# Altium PCB Ultrasonic.PcbDoc
Units mm, origin at the board's own origin, x right, y up, seen from the top; angles counter-clockwise.
Board outline 24.94 x 23.94 mm, 2 copper layers (Top Layer, Bottom Layer); 4 components, 4 nets, 10 pads, 24 vias.
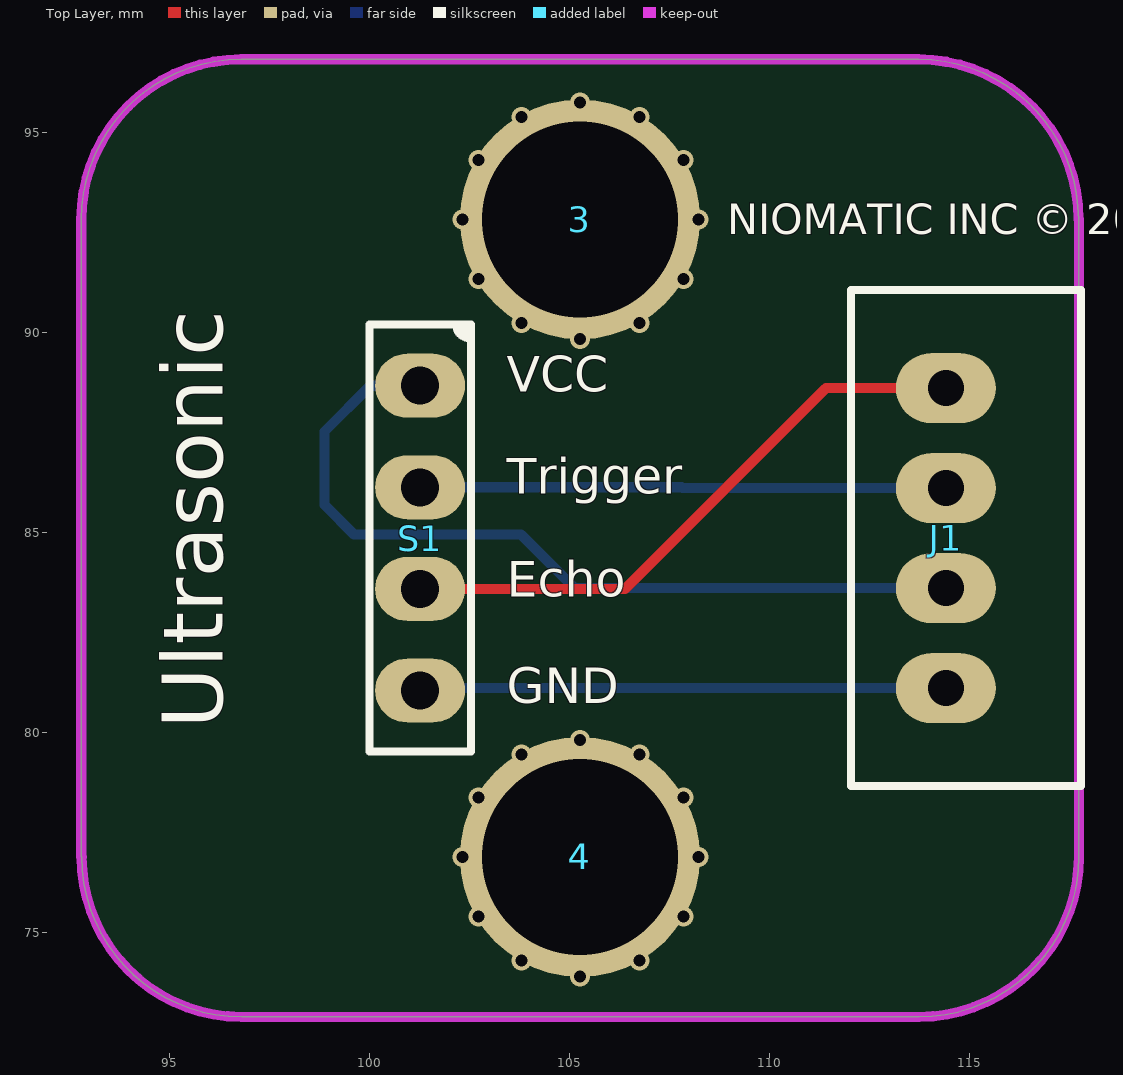
[diagram p0: Top Layer view]
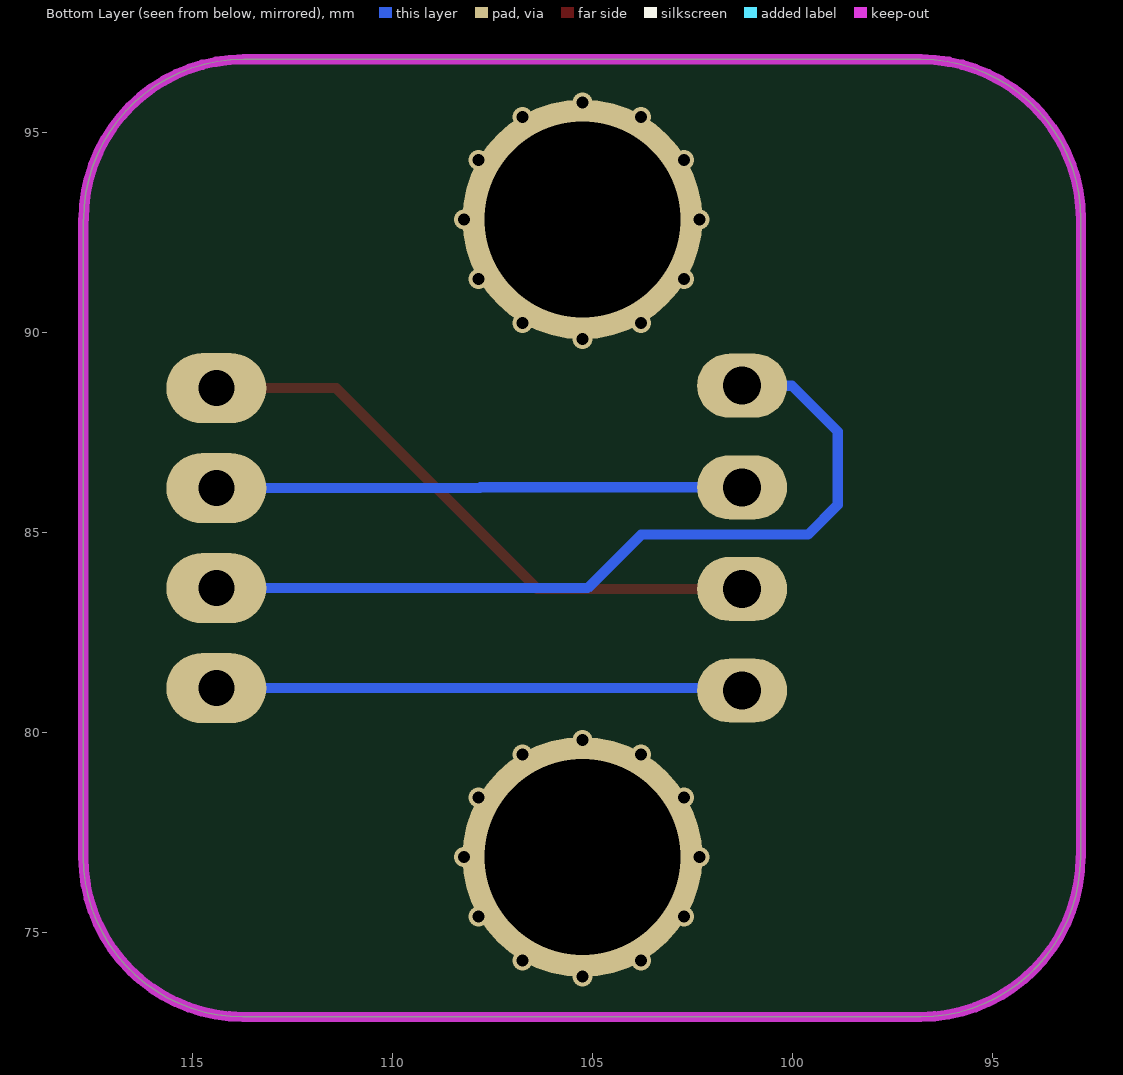
[diagram p1: Bottom Layer view, seen from below]

## Layer stack, top to bottom
Top Solder: solder mask 0.0102, Solder Resist, Dk 3.5
Top Layer: signal copper 0.0356
Dielectric 1: dielectric 0.32, FR-4, Dk 4.8
Bottom Layer: signal copper 0.0356
Bottom Solder: solder mask 0.0102, Solder Resist, Dk 3.5

## Board outline
92.79,76.88 92.79,92.82 cw(c96.79,92.82) 96.79,96.82 113.72,96.82 cw(c113.72,92.82) 117.72,92.82 117.729,92.82 117.729,76.88 cw(c113.729,76.88) 113.729,72.88 96.799,72.88 cw(c96.799,76.88)

## Design rules (kind name [scope] priority, off if disabled: settings)
Clearance [All] p1: gap=0.254 ignorepadtopadclearanceinfootprint=FALSE except(0: Arc-Hole Track-Hole SMDPad-Hole THPad-Hole Via-Hole Fill-Hole Poly-Hole Region-Hole Text-Hole)
PolygonConnect [All] p1: connectstyle=Relief reliefconductorwidth=0.254 reliefentries=4 polygonreliefangle="90 Angle" airgapwidth=0.254
RoomDefinition Ultrasonic [InComponentClass('Ultrasonic')] p1: confinementstyle=ConfineIn formatcopy=TRUE lockcomponents=FALSE outline 178.943,26.924 198.247,26.924 198.247,44.577 178.943,44.577
RoutingVias [All] p1: holewidth=0.711 width=1.27 viastyle="Through Hole" minholewidth=0.711 minwidth=1.27 maxholewidth=0.711 maxwidth=1.27
SolderMaskExpansion [All] p1: expansion=0.102
Width [All] p1: maxlimit=0.254 minlimit=0.254 preferedwidth=0.254
30 further rules are at their usual default settings.

## Classes and differential pairs
component class Ultrasonic: J1 S1

## Components (designator, comment, footprint, x,y, rotation, side; value= is the part's Value field where it differs from the comment)
3 "Lego" "Lego Hole" 105.255,92.82 r90 top
4 "Lego" "Lego Hole" 105.255,76.88 r90 top
J1 "4 Pin" "JST XH B4B-XH-A - RIGHT" 114.404,84.85 r90 top
S1 "Ultrasonic Sensor HC-SR04" Ultrasonic 101.26,84.85 r270 top

## Footprints (in the part's own frame and the unit in brackets; to place one, negate y for a bottom-side part, rotate by r counter-clockwise, add the part's x,y. Pads: shape width x height; smd on the part's side, far side on the other; paste and mask are expansions set on the pad)
"JST XH B4B-XH-A - RIGHT" [mm]
  oval 1.75x2.5 hole 0.9: 1(-3.75,0) 2(-1.25,0) 3(1.25,0) 4(3.75,0)
  silkscreen extent -6.2,-3.38 6.2,2.38, body extent -6.2,-9.13 6.2,2.37, height 6.1
"Lego Hole" [mm]
  round 6 hole 4.9: 0(0,0)
Ultrasonic [mm] "Ultrasonic Sensor HC-SR04"
  oval 1.6x2.25 hole 0.95: 1(-3.81,0) 2(-1.27,0) 3(1.27,0) 4(3.81,0)
  silkscreen extent -5.34,-1.27 5.34,1.27, body extent -20.5,-17.72 20.5,0.28, height 21.2

## Via types
v1: diameter 0.5, hole 0.3, Top Layer to Bottom Layer, 24 vias

## Nets (pads, with @x,y where several pads share a name; then routed paths per layer and width w, separated by ;. In a path a pad name is that pad's centre, name@x,y a point inside that pad or via, vN(x,y) a via of type N, cw(c..) or ccw(c..) an arc to the next point about the centre after c; other vN are vias at no path point)
Echo: J1.4 S1.3 | length 15.2
  Top Layer w0.254: S1.3 106.384,83.58 111.404,88.6 J1.4
GND: J1.1 S1.4 | length 13.2
  Bottom Layer w0.254: S1.4 101.32,81.1 J1.1
Trig: J1.3 S1.2 | length 13.2
  Bottom Layer w0.254: S1.2 107.798,86.12 107.818,86.1 J1.3
VCC: J1.2 S1.1 | length 21.1
  Bottom Layer w0.254: S1.1 100.014,88.66 98.87,87.516 98.87,85.68 99.612,84.938 103.784,84.938 105.122,83.6 J1.2
pads on no net: 3.0 4.0
copper on no net:
  other v1: 105.255,73.891 103.789,74.291 106.749,74.291 102.717,75.386 107.843,75.386 102.325,76.88 108.215,76.88 102.717,78.361 107.843,78.361 103.789,79.444 106.749,79.444 105.255,79.801 105.255,89.831 103.789,90.231 106.749,90.231 102.717,91.325 107.843,91.325 102.325,92.82 108.215,92.82 102.717,94.301 107.843,94.301 103.789,95.384 106.749,95.384 105.255,95.741

## Keep-outs
Keep-Out Layer:
  lines w0.254: 92.79,76.88 92.79,92.82 cw(c96.79,92.82) 96.79,96.82 113.72,96.82 cw(c113.72,92.82) 117.72,92.82 ; 92.799,76.88 ccw(c96.799,76.88) 96.799,72.88 113.729,72.88 ccw(c113.729,76.88) 117.729,76.88 117.729,92.82

## Silkscreen, mask and mechanical layers (free items; w line width, h text height)
Top Overlay:
  text "NIOMATIC INC © 2018" at 108.94,92.2 h1.3
  text "VCC" at 103.421,88.21 h1.52
  text "Trigger" at 103.42,85.66 h1.52
  text "Echo" at 103.42,83.08 h1.52
  text "GND" at 103.42,80.42 h1.52
  text "Ultrasonic" at 96.32,80.09 h1.52 r90
Top Solder:
  drawing of 381 lines, arcs and shapes, not listed
  text "NIOT Kit" at 108.94,93.13 h1.52